# Altium PCB BLE_Module_Latest.PcbDoc
Units mm, origin at the board's own origin, x right, y up, seen from the top; angles counter-clockwise.
Board outline 42 x 29.25 mm, 2 copper layers (Top Layer, Bottom Layer); 15 components, 13 nets, 67 pads, 28 vias.
Unrouted connection lines stored in the file: 9.
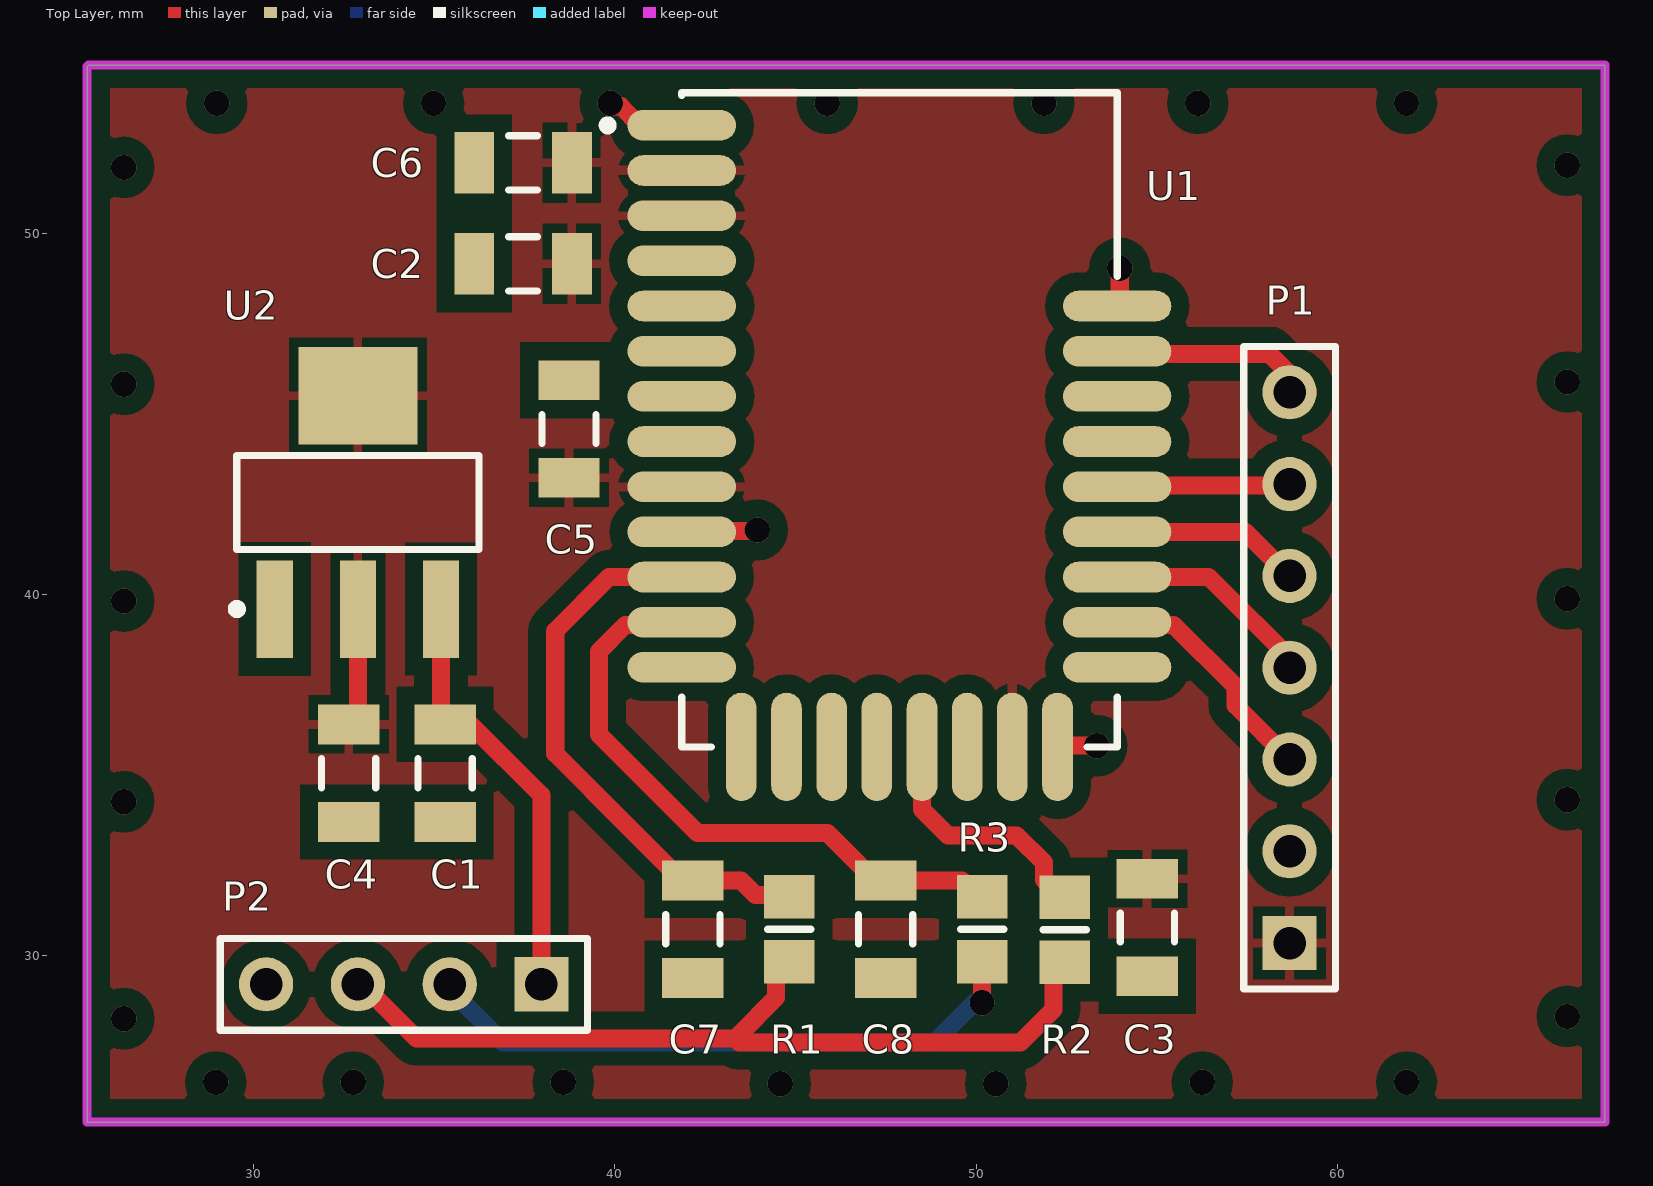
[diagram p0: Top Layer view]
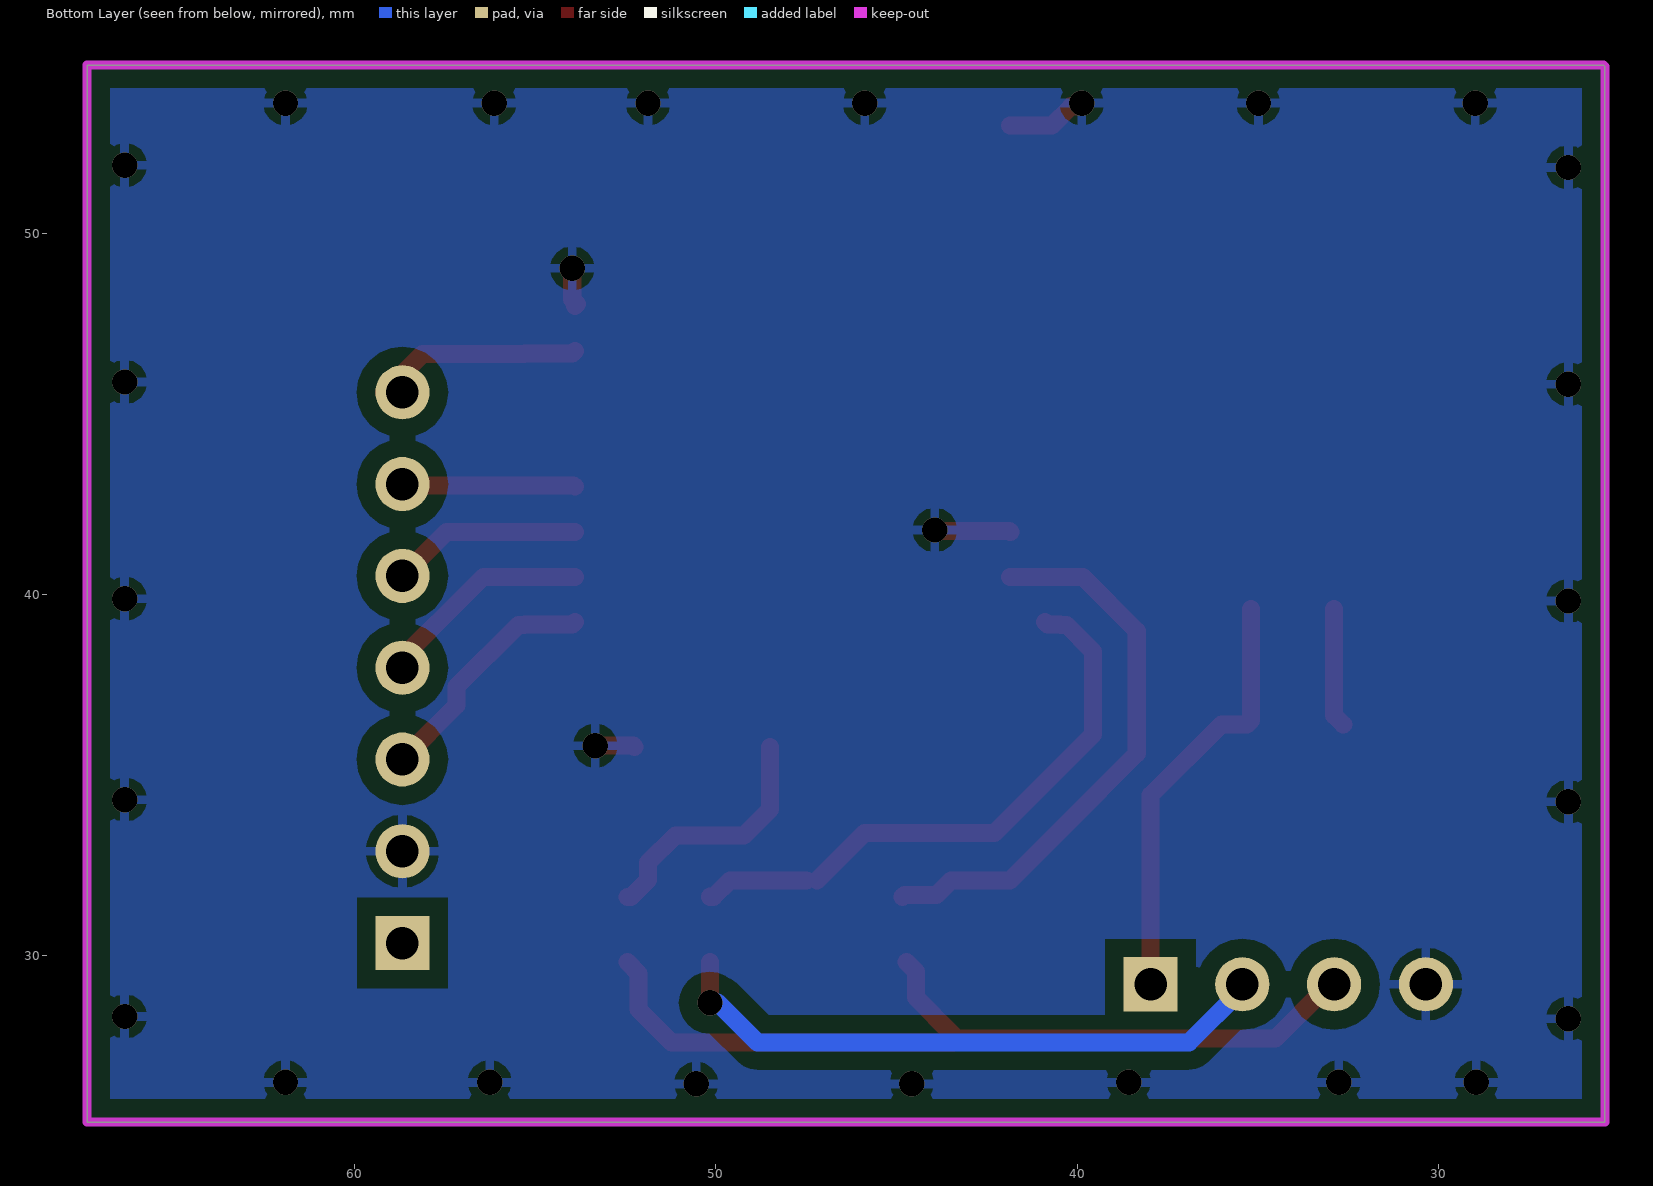
[diagram p1: Bottom Layer view, seen from below]
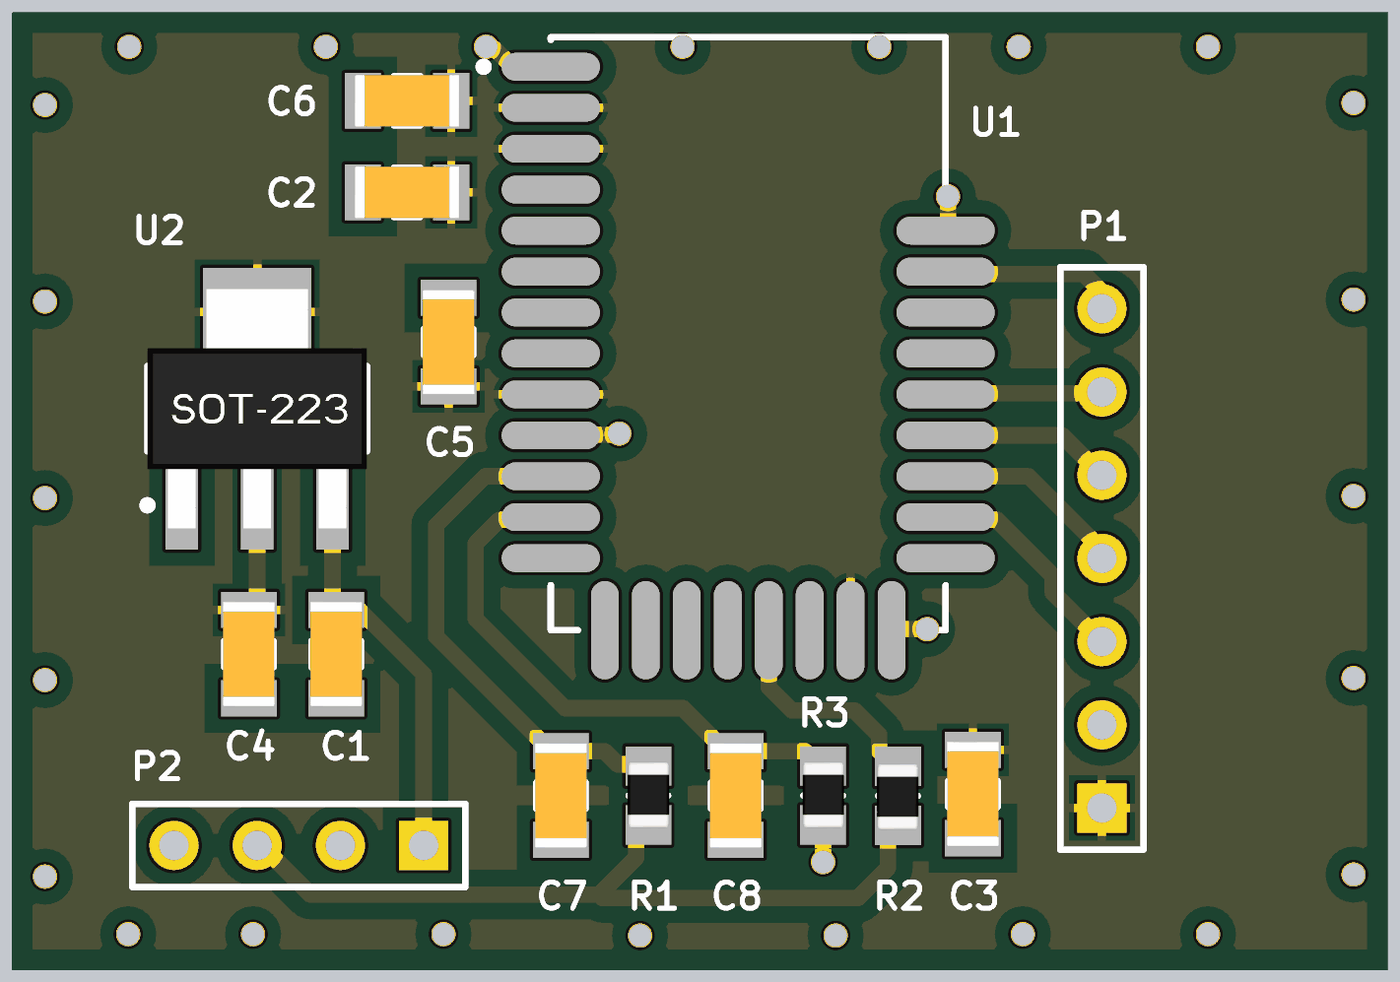
[diagram p2: 3D render of the assembled board from above, using the file's embedded part models]

## Layer stack, top to bottom
Top Solder: solder mask 0.0102, Solder Resist, Dk 3.5
Top Layer: signal copper 0.0356
Dielectric 1: dielectric 0.32, FR-4, Dk 4.8
Bottom Layer: signal copper 0.0356
Bottom Solder: solder mask 0.0102, Solder Resist, Dk 3.5

## Board outline
25.4,25.4 25.4,54.61 25.437,54.647 67.4,54.647 67.4,25.4

## Design rules (kind name [scope] priority, off if disabled: settings)
Clearance [All] p1: gap=0.5 ignorepadtopadclearanceinfootprint=TRUE
PolygonConnect [All] p1: connectstyle=Relief reliefconductorwidth=0.254 reliefentries=4 polygonreliefangle="90 Angle" airgapwidth=0.254
RoutingVias [All] p1: holewidth=0.711 width=1.27 viastyle="Through Hole" minholewidth=0.711 minwidth=1.27 maxholewidth=0.711 maxwidth=1.27
SolderMaskExpansion [All] p1: expansion=0.102 istentingtop=FALSE
Width [All] p1: maxlimit=0.5 minlimit=0.5 preferedwidth=0.5 checkconnectedcopper=TRUE
30 further rules are at their usual default settings.

## Components (designator, comment, footprint, x,y, rotation, side; value= is the part's Value field where it differs from the comment)
C1 "1u" C1206 35.306,35.052 r90 top value=100nF/100V
C2 "1u" C1206 37.465,49.149 r0 top value=100nF/100V
C3 "1u" C1206 54.737,30.781 r90 top value=100nF/100V
C4 "4u7" C1206 32.639,35.052 r90 top value=100nF/100V
C5 "1u" C1206 38.735,44.577 r270 top value=100nF/100V
C6 "1u" C1206 37.465,51.943 r0 top value=100nF/100V
C7 "Cap CER" C1206 42.164,30.734 r90 top value=100nF/100V
C8 "Cap CER" C1206 47.498,30.734 r90 top value=100nF/100V
P1 "BLE Headers" HDR1X7 58.674,30.353 r90 top
P2 "Header 4" HDR1X4 37.973,29.21 r180 top
R1 "Resistor 0805" R0805 44.831,30.734 r270 top value=?
R2 "Resistor 0805" R0805 52.451,30.723 r90 top value=?
R3 "Resistor 0805" R0805 50.165,30.734 r270 top value=?
U1 "BLE112-A-V1" BLUE-BLE112-A-V1_V 47.879,44.831 r0 top
U2 "LDL1117S33R" SOT223L 32.893,42.545 r90 top value=3.3V/1.2A

## Footprints (in the part's own frame and the unit in brackets; to place one, negate y for a bottom-side part, rotate by r counter-clockwise, add the part's x,y. Pads: shape width x height; smd on the part's side, far side on the other; paste and mask are expansions set on the pad)
BLUE-BLE112-A-V1_V [mm] "BLE112-A, 30-Leads, Body 12.05x18.1mm, Pitch 1.25mm"
  oval 3x0.85 smd: 1(-6.025,8.15) 2(-6.025,6.9) 3(-6.025,5.65) 4(-6.025,4.4) 5(-6.025,3.15) 6(-6.025,1.9) 7(-6.025,0.65) 8(-6.025,-0.6) 9(-6.025,-1.85) 10(-6.025,-3.1) 11(-6.025,-4.35) 12(-6.025,-5.6) 13(-6.025,-6.85) 22(6.025,-6.85) 23(6.025,-5.6) 24(6.025,-4.35) 25(6.025,-3.1) 26(6.025,-1.85) 27(6.025,-0.6) 28(6.025,0.65) 29(6.025,1.9) 30(6.025,3.15)
  oval 0.85x3 smd: 14(-4.375,-9.05) 15(-3.125,-9.05) 16(-1.875,-9.05) 17(-0.625,-9.05) 18(0.625,-9.05) 19(1.875,-9.05) 20(3.125,-9.05) 21(4.375,-9.05)
  silkscreen extent -8.2,-9.05 6.02,9.05, body extent -6.02,-9.05 6.02,9.05, height 2.3
C1206 [mm] "Chip Capacitor, Body 3.2x1.6mm, IPC High Density"
  rect 1.1x1.7 smd: 1(-1.35,0) 2(1.35,0)
  silkscreen extent -0.4,-0.75 0.4,0.75, body extent -1.6,-0.8 1.6,0.8, height 1.5
HDR1X4 [mm] "Connector; Header; 4 Position"
  rect 1.5x1.5 hole 0.9: 1(0,0)
  round 1.5 hole 0.9: 2(2.54,0) 3(5.08,0) 4(7.62,0)
  silkscreen extent -1.27,-1.27 8.89,1.27
HDR1X7 [mm] "Connector; Header; 7 Position"
  rect 1.5x1.5 hole 0.9: 1(0,0)
  round 1.5 hole 0.9: 2(2.54,0) 3(5.08,0) 4(7.62,0) 5(10.16,0) 6(12.7,0) 7(15.24,0)
  silkscreen extent -1.27,-1.27 16.51,1.27
R0805 [mm]
  rect 1.2x1.4 smd: 1(-0.9,0) 2(0.9,0)
  silkscreen extent 0,-0.6 0,0.6, body extent -1.04,-0.63 0.99,0.64, height 0.6
SOT223L [mm] "SOT223/SC73, 4-Leads, Body 6.5x3.5mm, Pitch 2.3mm, Lead Span 7mm, IPC Low Density"
  rect 2.7x1 smd: 1(-2.95,2.3) 2(-2.95,0) 3(-2.95,-2.3)
  rect 2.7x3.3 smd: 2(2.95,0)
  silkscreen extent -3.07,-3.35 1.3,3.47, body extent -3.65,-3.35 3.65,3.35, height 1.83

## Part data
C1 C2 C3 C4 C5 C6 C7 C8: library part "Cap CER Decoup C3216C0G2A104J160AC", "CAP CER 0.1UF 100V C0G 1206", Manufacturer="TDK Corporation", MPN=C3216C0G2A104J160AC, Supplier Part Number 1=1795799, Part Description="CAP CER 0.1UF 100V C0G 1206", Supplier 1=RSComponents, Supplier 2=Element14, Supplier 3=Digi-Key, Supplier 4=Mouser, Supplier Part Number 2=2906828, Supplier Part Number 3=445-172677-1-ND, Supplier Part Number 4=810-C3216C0G2A104J6C, Type="Surface mount"
P1: library part "Header 7", "Header, 7-Pin", LatestRevisionDate=17-Jul-2002, LatestRevisionNote="Re-released for DXP Platform.", Publisher="Altium Limited"
P2: "Header, 4-Pin", LatestRevisionDate=17-Jul-2002, LatestRevisionNote="Re-released for DXP Platform.", Publisher="Altium Limited"
R1 R2 R3: library part RES0805, "RES0805", MPN=?, Part Description=?, Type="Surface Mount"
U1: "Bluetooth(R) Low Energy Single Mode Module / , 2 to 3.6 V, -40 to 85 degC, 30-Pin SMD, RoHS, Tape and Reel", Max Operating Temperature="85 degC", Max Supply Voltage="3.6 V", Min Operating Temperature="-40 degC", Min Supply Voltage="2.1 V", ComponentLink1Description="Manufacturer URL", ComponentLink1URL=www.bluegiga.com, ComponentLink2Description=Datasheet, ComponentLink2URL=http://www.mouser.com/ds/2/368/Bluegiga_Technologies_BLE112_Datasheet-558666.pdf, DatasheetVersion="Rev. 1.4, 05/2013", PackageDescription="30-Pin Surface Mount Device, Body 12.05 x 18.1 mm, Pitch 1.25 mm", PackageReference=BLE112-A-V1, Packaging="Cut Tape", PartNumber=BLE112-A-V1, Pins=64, REACH SVHC="No SVHC", RoHSCompliant=true
U2: library part "LDO LDL1117S33R", "IC REG LINEAR 3.3V 1.2A SOT223", Manufacturer=STMicroelectronics, Supplier Part Number 1=2729708, MPN=LDL1117S33R, Part Description="IC REG LINEAR 3.3V 1.2A SOT223", Supplier 1=Element14, Supplier 2=Digi-Key, Supplier 3=Mouser, Supplier Part Number 2=497-17239-1-ND, Supplier Part Number 3=511-LDL1117S33R, Type="Surface mount"

## Via types
v1: diameter 0.7, hole 0.7, Top Layer to Bottom Layer, 28 vias

## Nets (pads, with @x,y where several pads share a name; then routed paths per layer and width w, separated by ;. In a path a pad name is that pad's centre, name@x,y a point inside that pad or via, vN(x,y) a via of type N, cw(c..) or ccw(c..) an arc to the next point about the centre after c; other vN are vias at no path point)
3V3: C2.2 C3.2 C4.2 C5.2 C6.2 P1.1 U1.2 U1.3 U1.9 U1.20 U2.2 | length 3.3
  Top Layer w0.5: C4.2 32.893,36.656 U2.2@32.893,39.595
5V: C1.2 P2.1 U2.3 | length 12
  Top Layer w0.5: U2.3 35.193,36.515 C1.2 36.013,36.402 37.973,34.442 P2.1
CTS_0: P1.4 U1.24 | length 6.2
  Top Layer w0.5: U1.24 56.437,40.481 58.945,37.973 P1.4@59.023,37.973
D+: P2.3 R1.2 R2.1 | length 23.9
  Top Layer w0.5: P2.3@33.274,28.956 34.52,27.71 43.331,27.71 ; R1.2@44.731,29.834 44.463,29.566 44.463,28.842 43.434,27.813 43.331,27.71 ; R2.1 52.141,29.513 52.141,28.519 51.224,27.602 43.439,27.602 43.331,27.71
D-: P2.2 R3.2 | length 17.1
  Top Layer w0.5: v1(50.165,28.702) R3.2
  Bottom Layer w0.5: P2.2 35.433,29.083 36.916,27.6 48.852,27.6 49.954,28.702 v1(50.165,28.702)
GND: C1.1 C2.1 C3.1 C4.1 C5.1 C6.1 C7.1 C8.1 P1.2 P2.4 U1.1 U1.10 U1.21 U1.30 U2.1 | length 6.6
  Top Layer w0.5: v1(39.878,53.594) 39.963,53.509 40.167,53.509 40.694,52.981 U1.1 ; U1.10 41.88,41.757 43.916,41.757 v1(43.942,41.783) ; U1.21 52.287,35.814 v1(53.34,35.814) ; U1.30 53.848,48.037 53.975,48.164 v1(53.975,49.022)
  other v1: 44.577,26.459 50.546,26.459 28.956,26.5 32.766,26.5 38.577,26.5 56.261,26.5 61.911,26.5 26.416,28.259 66.356,28.321 26.416,34.259 66.356,34.321 26.416,39.816 66.356,39.878 26.416,45.816 66.356,45.878 26.416,51.816 66.356,51.878 28.987,53.594 34.987,53.594 45.878,53.594 51.878,53.594 56.134,53.594 61.911,53.594
P1_0: R2.2 U1.18 | length 7
  Top Layer w0.5: U1.18 48.504,34.046 49.219,33.331 51.124,33.331 51.878,32.577 51.878,32.096 52.351,31.623 R2.2
RESET: P1.7 U1.29 | length 5.7
  Top Layer w0.5: U1.29 53.971,46.664 55.293,46.664 55.301,46.656 58.119,46.656 P1.7@59.182,45.593
RTS_0: P1.3 U1.23 | length 6.6
  Top Layer w0.5: U1.23 53.971,39.164 55.293,39.164 55.301,39.156 55.466,39.156 57.174,37.448 57.174,36.933 P1.3
RX_0: P1.6 U1.26 | length 4.8
  Top Layer w0.5: U1.26 53.94,43.017 58.674,43.017 P1.6@58.71,43.053
TX_0: P1.5 U1.25 | length 5.6
  Top Layer w0.5: U1.25 57.456,41.731 P1.5@58.884,40.303
USB+: C7.2 R1.1 U1.11 | length 15.6
  Top Layer w0.5: 40.342,33.606 38.354,35.593 38.354,38.989 39.846,40.481 U1.11 ; 40.342,33.606 41.864,32.084 C7.2 43.5,32.084 43.899,31.685 44.78,31.685 R1.1
USB-: C8.2 R3.1 U1.12 | length 16.1
  Top Layer w0.5: U1.12@40.889,39.231 40.822,39.164 40.465,39.164 40.457,39.156 40.292,39.156 39.563,38.426 39.563,36.129 42.291,33.401 45.889,33.401 46.775,32.515 46.775,32.507 47.198,32.084 C8.2@47.206,32.084 ; C8.2 49.615,32.084 50.065,31.634 R3.1
pads on no net: U1.4 U1.5 U1.6 U1.7 U1.8 U1.13 U1.14 U1.15 U1.16 U1.17 U1.19 U1.22 U1.27 U1.28

## Polygon pours and split planes (outlines as drawn)
3V3 on Top Layer "3V3_L01_P000" (solid, pour order 0): 25.437,54.647 67.4,54.647 67.4,25.4 25.4,25.4
GND on Bottom Layer "GND_L02_P001" (solid, pour order 1): 25.4,54.61 67.363,54.61 67.4,54.647 67.4,25.4 25.4,25.4

## Keep-outs
Keep-Out Layer:
  the board outline again, w0.254